# Altium PCB IO板.pcbdoc (part 2 of 2)
Units mil, origin at the board's own origin, x right, y up, seen from the top; angles counter-clockwise.
Board outline 8682.68 x 4967.05 mil, 2 copper layers (Top Layer, Bottom Layer); 114 components, 269 nets, 754 pads, 560 vias.
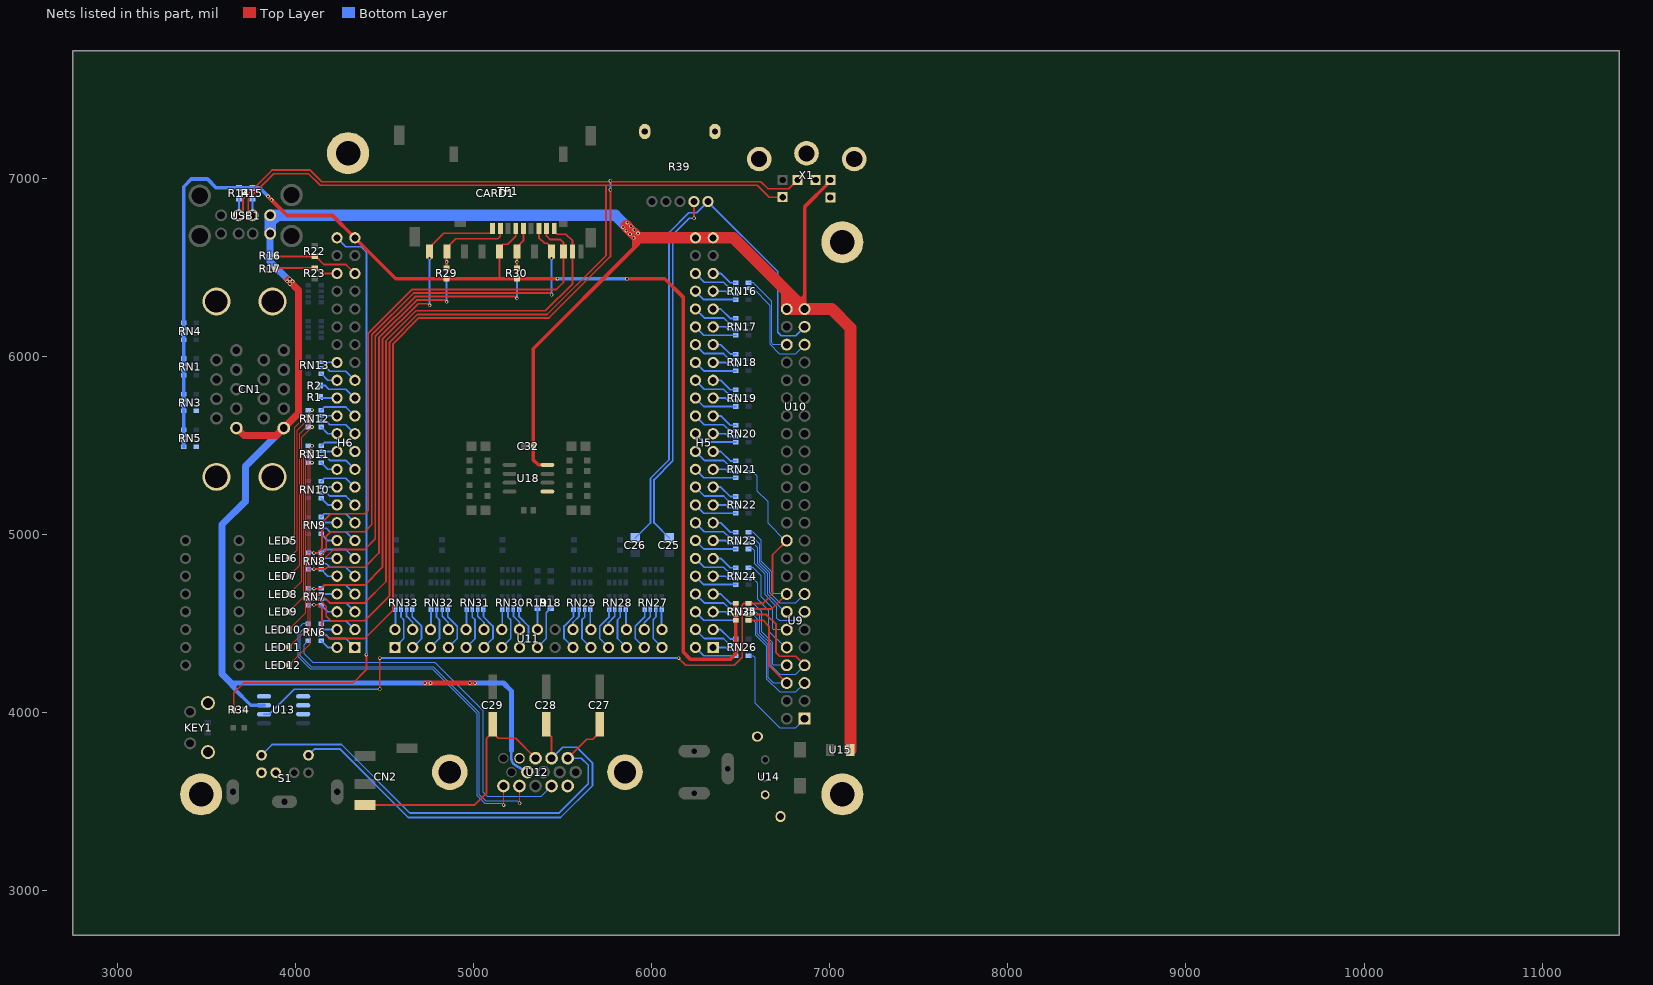
[diagram p2: the nets of this part, all layers, seen from the top]

## Via types
v1: diameter 20, hole 12, Top Layer to Bottom Layer, 560 vias

## Nets (pads, with @x,y where several pads share a name; then routed paths per layer and width w, separated by ;. In a path a pad name is that pad's centre, name@x,y a point inside that pad or via, vN(x,y) a via of type N, cw(c..) or ccw(c..) an arc to the next point about the centre after c; other vN are vias at no path point) (continued)
IO/12: H6.34 RN13.2 | length 89.9
  Bottom Layer w10: RN13.2@4144.1,5967.8 4232.91,5967.8 H6.34@4233.66,5967.05
IO/13: H6.31 RN13.3 | length 218.2
  Bottom Layer w10: RN13.3@4144.1,5936.3 4174.41,5936.3 4193.66,5917.05 4283.66,5917.05 H6.31@4333.66,5867.05
IO/14: H6.32 RN13.4 | length 105.2
  Bottom Layer w10: RN13.4@4144.1,5904.81 4181.86,5867.05 H6.32@4233.66,5867.05
IO/15: H6.29 R2.2 | length 224.3
  Bottom Layer w10: R2.2@4138.32,5837.05 4168.32,5837.05 4188.32,5817.05 4283.66,5817.05 H6.29@4333.66,5767.05
IO/16: H6.30 R1.2 | length 89.9
  Bottom Layer w10: R1.2@4144.1,5767.8 4232.91,5767.8 H6.30@4233.66,5767.05
IO/43: H6.27 RN12.1 | length 217.6
  Bottom Layer w10: RN12.1@4144.1,5699.29 4161.86,5717.05 4283.66,5717.05 H6.27@4333.66,5667.05
IO/44: H6.28 RN12.2 | length 89.9
  Bottom Layer w10: RN12.2@4144.1,5667.8 4232.91,5667.8 H6.28@4233.66,5667.05
IO/45: H6.25 RN12.3 | length 218.2
  Bottom Layer w10: RN12.3@4144.1,5636.3 4174.41,5636.3 4193.66,5617.05 4283.66,5617.05 H6.25@4333.66,5567.05
IO/46: H6.26 RN12.4 | length 105.2
  Bottom Layer w10: RN12.4@4144.1,5604.81 4181.86,5567.05 H6.26@4233.66,5567.05
IO/47: H6.23 RN11.1 | length 217.6
  Bottom Layer w10: RN11.1@4144.1,5499.29 4161.86,5517.05 4283.66,5517.05 H6.23@4333.66,5467.05
IO/48: H6.24 RN11.2 | length 89.9
  Bottom Layer w10: RN11.2@4144.1,5467.8 4232.91,5467.8 H6.24@4233.66,5467.05
IO/49: H6.21 RN11.3 | length 218.2
  Bottom Layer w10: RN11.3@4144.1,5436.3 4174.41,5436.3 4193.66,5417.05 4283.66,5417.05 H6.21@4333.66,5367.05
IO/50: H6.22 RN11.4 | length 105.2
  Bottom Layer w10: RN11.4@4144.1,5404.81 4181.86,5367.05 H6.22@4233.66,5367.05
IO/53: H6.19 RN10.1 | length 217.6
  Bottom Layer w10: RN10.1@4144.1,5299.29 4161.86,5317.05 4283.66,5317.05 H6.19@4333.66,5267.05
IO/54: H6.20 RN10.2 | length 89.9
  Bottom Layer w10: RN10.2@4144.1,5267.8 4232.91,5267.8 H6.20@4233.66,5267.05
IO/55: H6.17 RN10.3 | length 218.2
  Bottom Layer w10: RN10.3@4144.1,5236.3 4174.41,5236.3 4193.66,5217.05 4283.66,5217.05 H6.17@4333.66,5167.05
IO/56: H6.18 RN10.4 | length 105.2
  Bottom Layer w10: RN10.4@4144.1,5204.81 4181.86,5167.05 H6.18@4233.66,5167.05
IO/57: H6.15 RN9.1 | length 217.6
  Bottom Layer w10: RN9.1@4144.1,5099.29 4161.86,5117.05 4283.66,5117.05 H6.15@4333.66,5067.05
IO/58: H6.16 RN9.2 | length 89.9
  Bottom Layer w10: RN9.2@4144.1,5067.8 4232.91,5067.8 H6.16@4233.66,5067.05
IO/59: H6.13 RN9.3 | length 218.2
  Bottom Layer w10: RN9.3@4144.1,5036.3 4174.41,5036.3 4193.66,5017.05 4283.66,5017.05 H6.13@4333.66,4967.05
IO/60: H6.14 RN9.4 | length 105.2
  Bottom Layer w10: RN9.4@4144.1,5004.81 4181.86,4967.05 H6.14@4233.66,4967.05
IO/61: H6.11 RN8.1 | length 217.6
  Bottom Layer w10: RN8.1@4144.1,4899.29 4161.86,4917.05 4283.66,4917.05 H6.11@4333.66,4867.05
IO/62: H6.12 RN8.2 | length 89.9
  Bottom Layer w10: RN8.2@4144.1,4867.8 4232.91,4867.8 H6.12@4233.66,4867.05
IO/63: H6.9 RN8.3 | length 218.2
  Bottom Layer w10: RN8.3@4144.1,4836.3 4174.41,4836.3 4193.66,4817.05 4283.66,4817.05 H6.9@4333.66,4767.05
IO/64: H6.10 RN8.4 | length 105.2
  Bottom Layer w10: RN8.4@4144.1,4804.81 4181.86,4767.05 H6.10@4233.66,4767.05
IO/65: H6.7 RN7.1 | length 217.6
  Bottom Layer w10: RN7.1@4144.1,4699.29 4161.86,4717.05 4283.66,4717.05 H6.7@4333.66,4667.05
IO/66: H6.8 RN7.2 | length 89.9
  Bottom Layer w10: RN7.2@4144.1,4667.8 4232.91,4667.8 H6.8@4233.66,4667.05
IO/67: H6.5 RN7.3 | length 218.2
  Bottom Layer w10: RN7.3@4144.1,4636.3 4174.41,4636.3 4193.66,4617.05 4283.66,4617.05 H6.5@4333.66,4567.05
IO/68: H6.6 RN7.4 | length 105.2
  Bottom Layer w10: RN7.4@4144.1,4604.81 4181.86,4567.05 H6.6@4233.66,4567.05
IO/73: H6.3 RN6.1 | length 217.6
  Bottom Layer w10: RN6.1@4144.1,4499.29 4161.86,4517.05 4283.66,4517.05 H6.3@4333.66,4467.05
IO/74: H6.4 RN6.2 | length 89.9
  Bottom Layer w10: RN6.2@4144.1,4467.8 4232.91,4467.8 H6.4@4233.66,4467.05
IO/75: H6.1 RN6.3 | length 218.2
  Bottom Layer w10: RN6.3@4144.1,4436.3 4174.41,4436.3 4193.66,4417.05 4283.66,4417.05 H6.1@4333.66,4367.05
IO/76: H6.2 RN6.4 | length 105.2
  Bottom Layer w10: RN6.4@4144.1,4404.81 4181.86,4367.05 H6.2@4233.66,4367.05
IO/121: H5.2 RN26.1 | length 247.1
  Bottom Layer w10: H5.2@6245.67,4367.05 6292.91,4319.81 RN26.1@6473.23,4319.81
IO/122: H5.1 RN26.2 | length 134.1
  Bottom Layer w10: H5.1@6345.67,4367.05 6415.67,4367.05 6431.42,4351.3 RN26.2@6473.23,4351.3
IO/123: H5.4 RN26.3 | length 262.5
  Bottom Layer w10: H5.4@6245.67,4467.05 6295.67,4417.05 6403.66,4417.05 6437.91,4382.8 RN26.3@6473.23,4382.8
IO/124: H5.3 RN26.4 | length 149.4
  Bottom Layer w10: H5.3@6345.67,4467.05 6388.66,4467.05 6441.42,4414.29 RN26.4@6473.23,4414.29
IO/125: H5.6 RN25.1 | length 247.1
  Bottom Layer w10: H5.6@6245.67,4567.05 6292.91,4519.81 RN25.1@6473.23,4519.81
IO/126: H5.5 RN25.2 | length 134.1
  Bottom Layer w10: H5.5@6345.67,4567.05 6415.67,4567.05 6431.42,4551.3 RN25.2@6473.23,4551.3
IO/127: H5.8 RN25.3 | length 262.5
  Bottom Layer w10: H5.8@6245.67,4667.05 6295.67,4617.05 6403.66,4617.05 6437.91,4582.8 RN25.3@6473.23,4582.8
IO/128: H5.7 RN25.4 | length 149.4
  Bottom Layer w10: H5.7@6345.67,4667.05 6388.66,4667.05 6441.42,4614.29 RN25.4@6473.23,4614.29
IO/131: H5.10 RN24.1 | length 247.1
  Bottom Layer w10: H5.10@6245.67,4767.05 6292.91,4719.81 RN24.1@6473.23,4719.81
IO/132: H5.9 RN24.2 | length 134.1
  Bottom Layer w10: H5.9@6345.67,4767.05 6415.67,4767.05 6431.42,4751.3 RN24.2@6473.23,4751.3
IO/133: H5.12 RN24.3 | length 262.5
  Bottom Layer w10: H5.12@6245.67,4867.05 6295.67,4817.05 6403.66,4817.05 6437.91,4782.8 RN24.3@6473.23,4782.8
IO/134: H5.11 RN24.4 | length 149.4
  Bottom Layer w10: H5.11@6345.67,4867.05 6388.66,4867.05 6441.42,4814.29 RN24.4@6473.23,4814.29
IO/135: H5.14 RN23.1 | length 247.1
  Bottom Layer w10: H5.14@6245.67,4967.05 6292.91,4919.81 RN23.1@6473.23,4919.81
IO/136: H5.13 RN23.2 | length 134.1
  Bottom Layer w10: H5.13@6345.67,4967.05 6415.67,4967.05 6431.42,4951.3 RN23.2@6473.23,4951.3
IO/137: H5.16 RN23.3 | length 262.5
  Bottom Layer w10: H5.16@6245.67,5067.05 6295.67,5017.05 6403.66,5017.05 6437.91,4982.8 RN23.3@6473.23,4982.8
IO/138: H5.15 RN23.4 | length 149.4
  Bottom Layer w10: H5.15@6345.67,5067.05 6388.66,5067.05 6441.42,5014.29 RN23.4@6473.23,5014.29
IO/139: H5.18 RN22.1 | length 247.1
  Bottom Layer w10: H5.18@6245.67,5167.05 6292.91,5119.81 RN22.1@6473.23,5119.81
IO/140: H5.17 RN22.2 | length 134.1
  Bottom Layer w10: H5.17@6345.67,5167.05 6415.67,5167.05 6431.42,5151.3 RN22.2@6473.23,5151.3
IO/141: H5.20 RN22.3 | length 262.5
  Bottom Layer w10: H5.20@6245.67,5267.05 6295.67,5217.05 6403.66,5217.05 6437.91,5182.8 RN22.3@6473.23,5182.8
IO/143: H5.19 RN22.4 | length 149.4
  Bottom Layer w10: H5.19@6345.67,5267.05 6388.66,5267.05 6441.42,5214.29 RN22.4@6473.23,5214.29
IO/152: H5.22 RN21.1 | length 247.1
  Bottom Layer w10: H5.22@6245.67,5367.05 6292.91,5319.81 RN21.1@6473.23,5319.81
IO/153: H5.21 RN21.2 | length 134.1
  Bottom Layer w10: H5.21@6345.67,5367.05 6415.67,5367.05 6431.42,5351.3 RN21.2@6473.23,5351.3
IO/156: H5.24 RN21.3 | length 262.5
  Bottom Layer w10: H5.24@6245.67,5467.05 6295.67,5417.05 6403.66,5417.05 6437.91,5382.8 RN21.3@6473.23,5382.8
IO/158: H5.23 RN21.4 | length 149.4
  Bottom Layer w10: H5.23@6345.67,5467.05 6388.66,5467.05 6441.42,5414.29 RN21.4@6473.23,5414.29
IO/159: H5.26 RN20.1 | length 247.1
  Bottom Layer w10: H5.26@6245.67,5567.05 6292.91,5519.81 RN20.1@6473.23,5519.81
IO/160: H5.25 RN20.2 | length 134.1
  Bottom Layer w10: H5.25@6345.67,5567.05 6415.67,5567.05 6431.42,5551.3 RN20.2@6473.23,5551.3
IO/161: H5.28 RN20.3 | length 262.5
  Bottom Layer w10: H5.28@6245.67,5667.05 6295.67,5617.05 6403.66,5617.05 6437.91,5582.8 RN20.3@6473.23,5582.8
IO/162: H5.27 RN20.4 | length 149.4
  Bottom Layer w10: H5.27@6345.67,5667.05 6388.66,5667.05 6441.42,5614.29 RN20.4@6473.23,5614.29
IO/163: H5.30 RN19.1 | length 247.1
  Bottom Layer w10: H5.30@6245.67,5767.05 6292.91,5719.81 RN19.1@6473.23,5719.81
IO/164: H5.29 RN19.2 | length 134.1
  Bottom Layer w10: H5.29@6345.67,5767.05 6415.67,5767.05 6431.42,5751.3 RN19.2@6473.23,5751.3
IO/165: H5.32 RN19.3 | length 262.5
  Bottom Layer w10: H5.32@6245.67,5867.05 6295.67,5817.05 6403.66,5817.05 6437.91,5782.8 RN19.3@6473.23,5782.8
IO/166: H5.31 RN19.4 | length 149.4
  Bottom Layer w10: H5.31@6345.67,5867.05 6388.66,5867.05 6441.42,5814.29 RN19.4@6473.23,5814.29
IO/167: H5.34 RN18.1 | length 247.1
  Bottom Layer w10: H5.34@6245.67,5967.05 6292.91,5919.81 RN18.1@6473.23,5919.81
IO/168: H5.33 RN18.2 | length 134.1
  Bottom Layer w10: H5.33@6345.67,5967.05 6415.67,5967.05 6431.42,5951.3 RN18.2@6473.23,5951.3
IO/169: H5.36 RN18.3 | length 262.5
  Bottom Layer w10: H5.36@6245.67,6067.05 6295.67,6017.05 6403.66,6017.05 6437.91,5982.8 RN18.3@6473.23,5982.8
IO/170: H5.35 RN18.4 | length 149.4
  Bottom Layer w10: H5.35@6345.67,6067.05 6388.66,6067.05 6441.42,6014.29 RN18.4@6473.23,6014.29
IO/173: H5.38 RN17.1 | length 247.1
  Bottom Layer w10: H5.38@6245.67,6167.05 6292.91,6119.81 RN17.1@6473.23,6119.81
IO/174: H5.37 RN17.2 | length 134.1
  Bottom Layer w10: H5.37@6345.67,6167.05 6415.67,6167.05 6431.42,6151.3 RN17.2@6473.23,6151.3
IO/175: H5.40 RN17.3 | length 262.5
  Bottom Layer w10: H5.40@6245.67,6267.05 6295.67,6217.05 6403.66,6217.05 6437.91,6182.8 RN17.3@6473.23,6182.8
IO/176: H5.39 RN17.4 | length 149.4
  Bottom Layer w10: H5.39@6345.67,6267.05 6388.66,6267.05 6441.42,6214.29 RN17.4@6473.23,6214.29
IO/177: H5.42 RN16.1 | length 247.1
  Bottom Layer w10: H5.42@6245.67,6367.05 6292.91,6319.81 RN16.1@6473.23,6319.81
IO/178: H5.41 RN16.2 | length 134.1
  Bottom Layer w10: H5.41@6345.67,6367.05 6415.67,6367.05 6431.42,6351.3 RN16.2@6473.23,6351.3
IO/179: H5.44 RN16.3 | length 262.5
  Bottom Layer w10: H5.44@6245.67,6467.05 6295.67,6417.05 6403.66,6417.05 6437.91,6382.8 RN16.3@6473.23,6382.8
IO/180: H5.43 RN16.4 | length 149.4
  Bottom Layer w10: H5.43@6345.67,6467.05 6388.66,6467.05 6441.42,6414.29 RN16.4@6473.23,6414.29
IORQ: RN24.5 U9.12 | length 494.9
  Bottom Layer w6: RN24.5@6544.1,4814.29 6571.42,4814.29 6615.69,4770.02 6615.69,4650.93 6679.66,4586.96 6679.66,4473.05 6685.66,4467.05 U9.12@6758.66,4467.05
KCLK: R14.1 RN7.5 USB1.7 X1.1 | length 7481.1
  Top Layer w10: USB1.7@3681.27,6793.1 3706.27,6818.1 3706.27,6884.66 3868.66,7047.05 4083.66,7047.05 4148.66,6982.05 6613.65,6982.05 6653.65,6942.05 6769.67,6942.05 X1.1@6818.67,6991.05 ; v1(4103.66,4607.05) 4128.66,4607.05 4148.66,4587.05 4148.66,4457.05 4188.66,4417.05 4388.66,4417.05 4548.66,4577.05 4548.66,6072.05 4693.66,6217.05 5423.66,6217.05 5768.66,6562.05 v1(5768.66,6937.05)
  Bottom Layer w10: USB1.7@3681.27,6793.1 3683.66,6795.49 R14.1@3683.66,6887.39 ; RN7.5@4073.23,4604.81 4075.47,4607.05 v1(4103.66,4607.05) ; v1(5768.66,6937.05) v1(5768.66,6987.05)
KDAT: R15.1 RN7.6 USB1.6 X1.6 | length 7140.9
  Top Layer w10: USB1.6@3760.07,6793.1 3735.07,6818.1 3735.07,6883.46 3878.66,7027.05 4073.66,7027.05 4138.66,6962.05 5743.66,6962.05 ; v1(4103.66,4637.05) 4133.66,4637.05 4173.66,4597.05 4173.66,4542.05 4198.66,4517.05 4388.66,4517.05 4528.66,4657.05 4528.66,6080.33 4684.52,6236.19 5412.8,6236.19 5743.66,6567.05 5743.66,6962.05 ; X1.6@6735.67,6895.05 6660.66,6895.05 6593.66,6962.05 5743.66,6962.05
  Bottom Layer w10: R15.1@3758.66,6887.39 3758.66,6794.51 USB1.6@3760.07,6793.1 ; RN7.6@4073.23,4636.3 4073.98,4637.05 v1(4103.66,4637.05)
LED1: LED5.2 RN12.8 | length 786.3
  Top Layer w6: LED5.2@3963.16,4966.85 3996.66,5000.35 3996.66,5602.72 v1(4093.23,5699.29)
LED2: LED6.2 RN12.7 | length 854.8
  Top Layer w6: LED6.2@3963.16,4866.85 4008.66,4912.35 4008.66,5583.23 v1(4093.23,5667.8)
LED3: LED7.2 RN12.6 | length 923.3
  Top Layer w6: LED7.2@3963.16,4766.85 4020.66,4824.35 4020.66,5563.73 v1(4093.23,5636.3)
LED4: LED8.2 RN12.5 | length 991.8
  Top Layer w6: LED8.2@3963.16,4666.85 4032.66,4736.35 4032.66,5544.24 v1(4093.23,5604.81)
LED5: LED9.2 RN11.8 | length 986.3
  Top Layer w6: LED9.2@3963.16,4566.85 4044.66,4648.35 4044.66,5450.72 v1(4093.23,5499.29)
LED6: LED10.2 RN11.7 | length 1054.8
  Top Layer w6: LED10.2@3963.16,4466.85 4056.66,4560.35 4056.66,5431.23 v1(4093.23,5467.8)
LED7: LED11.2 RN11.6 | length 1123.3
  Top Layer w6: LED11.2@3963.16,4366.85 4068.66,4472.35 4068.66,5411.73 v1(4093.23,5436.3)
LED8: LED12.2 RN11.5 | length 1191.8
  Top Layer w6: LED12.2@3963.16,4266.85 4080.66,4384.35 4080.66,5392.24 v1(4093.23,5404.81)
M1: RN24.7 U9.10 | length 493.6
  Bottom Layer w6: RN24.7@6544.1,4751.3 6570.62,4751.3 6591.69,4730.22 6591.69,4640.99 6655.66,4577.02 6655.66,4461.56 6750.18,4367.05 U9.10@6758.66,4367.05
MERQ: RN23.8 U9.13 | length 650.2
  Bottom Layer w6: RN23.8@6544.1,4919.81 6568.69,4919.81 6579.69,4908.81 6579.69,4836.02 6637.68,4778.03 6637.68,4662.58 6703.69,4596.56 6703.69,4532.02 6718.66,4517.05 6808.66,4517.05 U9.13@6858.66,4567.05
PWRLED: H6.48 R34.1 | length 3437.1
  Top Layer w10: R34.1@3654,4017.05 3653.66,4017.39 3653.66,4112.05 3708.66,4167.05 4323.66,4167.05 4398.66,4242.05 v1(4398.66,4327.05)
  Bottom Layer w10: H6.48@4233.66,6667.05 4283.66,6617.05 4368.66,6617.05 4398.66,6587.05 v1(4398.66,4327.05)
RD: RN23.6 U9.15 | length 612.6
  Bottom Layer w6: RN23.6@6544.1,4982.8 6569.57,4982.8 6603.69,4948.68 6603.69,4845.96 6661.68,4787.97 6661.68,4675.86 6720.48,4617.05 6808.66,4617.05 U9.15@6858.66,4667.05
RESET: RN21.7 RN34.4 U9.22 U13.6 | length 4269.3
  Top Layer w10: v1(4473.66,4132.05) v1(4473.66,4307.05) ; v1(6151.16,4307.05) 6191.16,4267.05 6463.66,4267.05 6508.66,4312.05 6508.66,4607.05 6515.9,4614.29 RN34.4@6544.1,4614.29 6625.9,4614.29 6678.66,4667.05 6678.66,4887.05 U9.22@6758.66,4967.05
  Bottom Layer w6: RN21.7@6544.1,5351.3 6569.66,5351.3 6590.66,5330.3 6590.66,5247.02 6650.66,5187.02 6650.66,5066.56 6750.18,4967.05 U9.22@6758.66,4967.05
  Bottom Layer w10: U13.6@3823.58,3992.05 3853.66,3992.05 3993.66,4132.05 v1(4473.66,4132.05) ; v1(4473.66,4307.05) v1(6151.16,4307.05)
RFSH: RN25.6 RN34.2 U9.7 | length 1140.5
  Top Layer w10: RN34.2@6544.1,4551.3 6644.41,4551.3 6698.66,4497.05 6698.66,4337.05 6718.66,4317.05 6808.66,4317.05 U9.7@6858.66,4267.05
  Bottom Layer w6: RN25.6@6544.1,4582.8 6570.94,4582.8 6605.66,4548.08 6605.66,4448.99 6667.66,4386.99 6667.66,4268.05 6718.66,4217.05 6808.66,4217.05 U9.7@6858.66,4267.05
RSV5: RN25.7 RN34.1 U9.6 | length 1020.3
  Top Layer w10: RN34.1@6544.1,4519.81 6625.9,4519.81 6658.66,4487.05 6658.66,4267.05 U9.6@6758.66,4167.05
  Bottom Layer w6: RN25.7@6544.1,4551.3 6569.41,4551.3 6593.66,4527.05 6593.66,4444.02 6655.66,4382.02 6655.66,4197.02 6685.63,4167.05 U9.6@6758.66,4167.05
RSV16: RN23.5 RN34.3 U9.16 | length 743.3
  Top Layer w10: RN34.3@6544.1,4582.8 6674.41,4582.8 U9.16@6758.66,4667.05
  Bottom Layer w6: RN23.5@6544.1,5014.29 6571.42,5014.29 6615.69,4970.02 6615.69,4850.93 6673.68,4792.94 6673.68,4680.83 6687.45,4667.05 U9.16@6758.66,4667.05
SCLK: RN6.5 U12.12 | length 2097.6
  Bottom Layer w6: RN6.5@4073.23,4404.81 4049.66,4381.24 4049.66,4331.96 4099.57,4282.05 4784.57,4282.05 5054.66,4011.96 5054.66,3553.02 5078.63,3529.05 5378.34,3529.05 U12.12@5438.4,3589.1
SD_CK: CARD1.5 R30.1 RN8.6 TF1.5 | length 2903.8
  Top Layer w10: v1(4103.66,4837.05) 4133.66,4837.05 4213.66,4917.05 4388.66,4917.05 4448.66,4977.05 4448.66,6113.47 4672.24,6337.05 5233.66,6337.05 v1(5243.66,6327.05) ; R30.1@5243.66,6496.71 v1(5243.66,6532.05) 5243.66,6613.23 5280.32,6649.89 TF1.5@5280.32,6718.39
  Bottom Layer w10: RN8.6@4073.23,4836.3 4073.98,4837.05 v1(4103.66,4837.05) ; v1(5243.66,6327.05) v1(5243.66,6532.05)
SD_CM: CARD1.1 R29.1 RN8.5 TF1.2 | length 2823.9
  Top Layer w10: v1(4103.66,4807.05) 4168.66,4807.05 4178.66,4817.05 4388.66,4817.05 4468.66,4897.05 4468.66,6105.19 4680.52,6317.05 4838.66,6317.05 v1(4848.66,6307.05) ; R29.1@4848.66,6496.71 v1(4848.66,6532.05) 4848.66,6589.73 CARD1.1@4850.19,6591.26 4850.19,6611.26 4900.98,6662.05 5137.56,6662.05 5150.4,6674.89 TF1.2@5150.4,6718.39
  Bottom Layer w10: RN8.5@4073.23,4804.81 4075.47,4807.05 v1(4103.66,4807.05) ; v1(4848.66,6307.05) v1(4848.66,6532.05)
SD_D0: CARD1.7 RN8.7 TF1.7 | length 3027.5
  Top Layer w10: v1(4103.66,4867.05) 4128.66,4867.05 4173.66,4912.05 4173.66,4992.05 4198.66,5017.05 4388.66,5017.05 4428.66,5057.05 4428.66,6121.75 4663.96,6357.05 5428.66,6357.05 v1(5438.66,6347.05) ; TF1.7@5366.93,6718.39 5366.93,6668.18 5398.85,6636.26 5412.99,6636.26 5437.99,6611.26 CARD1.7@5437.99,6591.26
  Bottom Layer w10: RN8.7@4073.23,4867.8 4102.91,4867.8 v1(4103.66,4867.05) ; v1(5438.66,6347.05) v1(5438.66,6552.05)
SD_D1: CARD1.8 RN8.8 TF1.8 | length 3104.3
  Top Layer w10: v1(4103.66,4897.05) 4123.66,4897.05 4148.66,4922.05 4148.66,5067.05 4198.66,5117.05 4388.66,5117.05 4408.66,5137.05 4408.66,6130.04 4655.67,6377.05 5466.16,6377.05 5504.91,6415.8 CARD1.8@5504.91,6591.26 5504.91,6640.8 5488.66,6657.05 5430.24,6657.05 5410.24,6677.05 TF1.8@5410.24,6718.39
  Bottom Layer w10: RN8.8@4073.23,4899.29 4101.42,4899.29 v1(4103.66,4897.05)
SD_D2: CARD1.10 RN7.7 TF1.CD | length 3418.7
  Top Layer w10: v1(4103.66,4667.05) 4143.66,4667.05 4193.66,4617.05 4388.66,4617.05 4508.66,4737.05 4508.66,6088.62 4677.09,6257.05 5403.66,6257.05 5556.09,6409.48 CARD1.10@5556.09,6591.26 5556.09,6649.62 5518.66,6687.05 5468.66,6687.05 5453.55,6702.16 TF1.CD@5453.55,6718.39
  Bottom Layer w10: RN7.7@4073.23,4667.8 4102.91,4667.8 v1(4103.66,4667.05)
SD_D3: CARD1.9 RN7.8 TF1.1 | length 2791.5
  Top Layer w10: v1(4103.66,4697.05) 4143.66,4697.05 4163.66,4717.05 4388.66,4717.05 4488.66,4817.05 4488.66,6096.9 4688.81,6297.05 4743.66,6297.05 v1(4753.66,6287.05) ; CARD1.9@4751.76,6591.26 4751.76,6611.26 4832.55,6692.05 5095.75,6692.05 5107.09,6703.39 TF1.1@5107.09,6718.39
  Bottom Layer w10: RN7.8@4073.23,4699.29 4075.47,4697.05 v1(4103.66,4697.05) ; v1(4753.66,6287.05) v1(4753.66,6552.05)
SDAT: RN6.8 U12.15 | length 2102.9
  Top Layer w6: U12.15@5167.91,3589.1 5168.66,3588.35 v1(5168.66,3482.05)
  Bottom Layer w6: RN6.8@4073.23,4499.29 4040.9,4499.29 4013.66,4472.05 4013.66,4317.05 4084.66,4246.05 4769.66,4246.05 5018.66,3997.05 5018.66,3538.11 5063.72,3493.05 5157.66,3493.05 v1(5168.66,3482.05)
SL0: RN29.4 U11.21 | length 257.1
  Bottom Layer w10: U11.21@5558.66,4367.05 5508.66,4417.05 5508.66,4487.05 5561.42,4539.81 RN29.4@5561.42,4581.61
SL1: RN29.3 U11.22 | length 128.8
  Bottom Layer w10: U11.22@5558.66,4467.05 5558.66,4507.05 5592.91,4541.3 RN29.3@5592.91,4581.61
SL2: RN29.2 U11.23 | length 241.8
  Bottom Layer w10: RN29.2@5624.41,4581.61 5624.41,4537.8 5608.66,4522.05 5608.66,4417.05 U11.23@5658.66,4367.05
SL3: RN29.1 U11.24 | length 115.7
  Bottom Layer w10: RN29.1@5655.9,4581.61 5655.9,4469.81 U11.24@5658.66,4467.05
SL4: RN28.4 U11.25 | length 257.1
  Bottom Layer w10: U11.25@5758.66,4367.05 5708.66,4417.05 5708.66,4487.05 5761.42,4539.81 RN28.4@5761.42,4581.61
SL5: RN28.3 U11.26 | length 128.8
  Bottom Layer w10: U11.26@5758.66,4467.05 5758.66,4507.05 5792.91,4541.3 RN28.3@5792.91,4581.61
SLTSL1: RN25.8 U9.5 | length 651.3
  Bottom Layer w6: RN25.8@6544.1,4519.81 6570.66,4519.81 6581.66,4508.81 6581.66,4439.05 6643.66,4377.05 6643.66,4192.05 6718.66,4117.05 6808.66,4117.05 U9.5@6858.66,4167.05
SLTSL2: RN26.8 U9.1 | length 651.5
  Bottom Layer w6: RN26.8@6544.1,4319.81 6570.9,4319.81 6578.66,4312.05 6578.66,4057.05 6718.66,3917.05 6808.66,3917.05 U9.1@6858.66,3967.05
SOUND_L: C26.1 R39.5 U10.21 | length 3158.3
  Bottom Layer w10: C26.1@5908.66,4981.42 5993.66,5066.42 5993.66,5317.05 6097.66,5421.05 6097.66,6696.05 6209.14,6807.53 6253.47,6807.53 R39.5@6316.14,6870.19 6708.66,6477.68 6708.66,6137.05 6728.66,6117.05 6808.66,6117.05 U10.21@6858.66,6167.05
SOUND_R: C25.1 R39.3 | length 2034.1
  Top Layer w10: R39.3@6237.4,6870.19 6238.66,6868.94 v1(6238.66,6777.05)
  Bottom Layer w10: C25.1@6098.66,4981.42 6013.66,5066.42 6013.66,5309.42 6118.66,5414.42 6118.66,6685.09 6210.62,6777.05 v1(6238.66,6777.05)
SR0: RN28.2 U11.27 | length 241.8
  Bottom Layer w10: RN28.2@5824.41,4581.61 5824.41,4537.8 5808.66,4522.05 5808.66,4417.05 U11.27@5858.66,4367.05
SR1: RN28.1 U11.28 | length 115.7
  Bottom Layer w10: RN28.1@5855.9,4581.61 5855.9,4469.81 U11.28@5858.66,4467.05
SR2: RN27.4 U11.29 | length 257.1
  Bottom Layer w10: U11.29@5958.66,4367.05 5908.66,4417.05 5908.66,4487.05 5961.42,4539.81 RN27.4@5961.42,4581.61
SR3: RN27.3 U11.30 | length 128.8
  Bottom Layer w10: U11.30@5958.66,4467.05 5958.66,4505.24 5992.91,4539.49 RN27.3@5992.91,4581.61
SR4: RN27.2 U11.31 | length 241.8
  Bottom Layer w10: RN27.2@6024.41,4581.61 6024.41,4539.06 6008.66,4523.31 6008.66,4417.05 U11.31@6058.66,4367.05
SR5: RN27.1 U11.32 | length 115.7
  Bottom Layer w10: RN27.1@6055.9,4581.61 6055.9,4469.81 U11.32@6058.66,4467.05
SW1: RN16.6 U10.19 | length 614.5
  Bottom Layer w6: RN16.6@6544.1,6382.8 6569.36,6382.8 6662.66,6289.5 6662.66,6071.53 6717.15,6017.05 6808.66,6017.05 U10.19@6858.66,6067.05
SW2: RN16.5 U10.20 | length 494.9
  Bottom Layer w6: RN16.5@6544.1,6414.29 6569.84,6414.29 6674.66,6309.47 6674.66,6076.5 6684.12,6067.05 U10.20@6758.66,6067.05
USBN1: H6.43 R16.1 R22.2 | length 486.8
  Top Layer w10: R16.1@3888.32,6567.05 3892.98,6562.39 R22.2@4108.66,6562.39 4113.66,6562.39 4159,6517.05 4283.66,6517.05 H6.43@4333.66,6467.05
USBP1: H6.44 R17.1 R23.2 | length 359.6
  Top Layer w10: R17.1@3888.32,6492.05 3892.98,6496.71 R23.2@4108.66,6496.71 4114,6496.71 4143.66,6467.05 H6.44@4233.66,6467.05
VB0: RN33.4 U11.2 | length 115.7
  Bottom Layer w10: U11.2@4558.66,4467.05 4561.42,4469.81 RN33.4@4561.42,4581.61
VB1: RN33.3 U11.1 | length 241.8
  Bottom Layer w10: U11.1@4558.66,4367.05 4608.66,4417.05 4608.66,4522.05 4592.91,4537.8 RN33.3@4592.91,4581.61
VB2: RN33.2 U11.4 | length 128.8
  Bottom Layer w10: RN33.2@4624.41,4581.61 4624.41,4541.3 4658.66,4507.05 U11.4@4658.66,4467.05
VB3: RN33.1 U11.3 | length 257.1
  Bottom Layer w10: RN33.1@4655.9,4581.61 4655.9,4539.81 4708.66,4487.05 4708.66,4417.05 U11.3@4658.66,4367.05
VB4: RN32.4 U11.6 | length 115.7
  Bottom Layer w10: U11.6@4758.66,4467.05 4761.42,4469.81 RN32.4@4761.42,4581.61
VB5: RN32.3 U11.5 | length 241.8
  Bottom Layer w10: U11.5@4758.66,4367.05 4808.66,4417.05 4808.66,4522.05 4792.91,4537.8 RN32.3@4792.91,4581.61
VB_CV: C29.2 CN2.2 U12.3 | length 1467.2
  Top Layer w10: CN2.2@4390.55,3482.6 4391.1,3482.05 5003.66,3482.05 5073.66,3552.05 5073.66,3857.05 C29.2@5108.66,3892.04 ; U12.3@5348.23,3745 5236.18,3857.05 5138.66,3857.05 5108.66,3887.05 C29.2@5108.66,3892.04 ; C29.2@5108.66,3892.04 C29.2@5108.66,3936.93 5113.76,3936.93 5113.76,3897.15 C29.2@5108.66,3892.04
VCC5: C32.2 CN1.5 CN1.14 H5.47 H5.48 U10.23 U10.24 U12.9 U13.7 U15.2 U18.8 USB1.1 USB1.5 X1.5 | length 14449.7
  Top Layer w20: U18.8@5415.05,5391.94 5363.77,5391.94 5336.11,5419.59 5336.11,5496.94 C32.2@5336.22,5497.05 5336.22,6044.61 5898.66,6607.05 ; v1(5898.66,6667.05) 5898.66,6631.89 ; 5923.66,6667.05 5923.66,6656.89 5898.66,6631.89 ; 5958.66,6667.05 5898.66,6607.05 ; 6797.31,6328.4 6846.09,6328.4 6858.66,6340.97 ; U10.23@6858.66,6267.05 6858.66,6340.97 ; X1.5@7003.67,6991.05 7003.67,6984.56 6858.66,6839.55 6858.66,6340.97 ; 5898.66,6607.05 5898.66,6631.89
  Top Layer w27.56: v1(4728.66,4167.05) v1(4758.66,4167.05) v1(4978.66,4167.05) v1(5008.66,4167.05)
  Top Layer w39.37: CN1.5@3668.5,5598.94 3710.39,5557.05 3892.75,5557.05 CN1.14@3934.64,5598.94 4018.66,5682.96 4018.66,6372.05 3958.66,6432.05
  Top Layer w66.93: 5858.66,6732.05 5923.66,6667.05 5958.66,6667.05 H5.48@6245.67,6667.05 H5.47@6345.67,6667.05 6458.66,6667.05 6758.66,6367.05 ; U15.2@7115.55,3792.05 7115.55,6162.05 7010.55,6267.05 U10.23@6858.66,6267.05 ; 6758.66,6367.05 U10.24@6758.66,6267.05 U10.23@6858.66,6267.05 ; 6758.66,6367.05 6797.31,6328.4 U10.23@6858.66,6267.05
  Bottom Layer w15: 5212.61,3745 ccw(c5258.07,3745) 5235.34,3705.63 ; 5212.66,3745.05 5212.66,3787.05 ; 5234.66,3706.05 U12.9@5303.15,3667.05
  Bottom Layer w20: 3614.62,4177.05 3658.15,4133.52 ; 3672.53,4167.05 3658.15,4152.67 3658.15,4133.52 ; U13.7@3823.58,4042.05 3749.62,4042.05 3658.15,4133.52
  Bottom Layer w27.56: 3638.66,4167.05 3672.53,4167.05 v1(4728.66,4167.05) v1(4758.66,4167.05) ; v1(4978.66,4167.05) v1(5008.66,4167.05) 5168.66,4167.05 5212.66,4123.05 5212.66,3787.05
  Bottom Layer w39.37: 3638.66,4167.05 3588.66,4217.05 3588.66,5057.05 3718.66,5187.05 3718.66,5382.96 CN1.14@3934.64,5598.94 ; USB1.1@3858.47,6690.7 3858.47,6532.24 3978.66,6412.05
  Bottom Layer w62.99: USB1.1@3858.47,6690.7 3858.47,6752.55 ; 5908.66,6682.05 5797.61,6793.1 3899.02,6793.1 ; 3858.47,6752.55 3899.02,6793.1 ; 3858.47,6752.55 USB1.5@3858.47,6793.1 3899.02,6793.1
  other v1: 3968.66,6407.05 3953.66,6422.05 3983.66,6422.05 3968.66,6437.05 5878.66,6687.05 5923.66,6692.05 5858.66,6707.05 5903.66,6712.05 5838.66,6727.05 5883.66,6732.05 5863.66,6752.05
VCC33: CARD1.4 H6.47 R14.2 R15.2 R29.2 R30.2 RN1.1 RN1.2 RN1.3 RN1.4 RN3.1 RN3.2 RN3.3 RN3.4 RN4.5 RN4.6 RN4.7 RN4.8 RN5.5 RN5.6 RN5.7 RN5.8 RN34.5 RN34.6 RN34.7 RN34.8 TF1.4 | length 7520.9
  Top Layer w10: 5145.79,6437.39 5145.47,6437.71 CARD1.4@5145.47,6591.26 5145.47,6611.26 5165.47,6631.26 5192.87,6631.26 5237.01,6675.4 TF1.4@5237.01,6718.39
  Top Layer w20: v1(3846.16,6899.55) v1(3866.16,6879.55) 3953.66,6792.05 4208.66,6792.05 H6.47@4333.66,6667.05 4563.32,6437.39 R29.2@4848.66,6437.39 5145.79,6437.39 R30.2@5243.66,6437.39 v1(5471.16,6437.39) ; v1(5861.16,6437.05) 6073.66,6437.05 6178.66,6332.05 6178.66,4339.55 6218.66,4299.55 6441.16,4299.55 6473.23,4331.61 RN34.8@6473.23,4519.81 RN34.7@6473.23,4551.3 RN34.6@6473.23,4582.8 RN34.5@6473.23,4614.29
  Bottom Layer w20: RN5.5@3373.23,5494.81 RN5.6@3373.23,5526.3 RN5.7@3373.23,5557.8 RN5.8@3373.23,5589.29 RN3.1@3373.23,5694.81 RN3.2@3373.23,5726.3 RN3.3@3373.23,5757.8 RN3.4@3373.23,5789.29 RN1.1@3373.23,5894.81 RN1.2@3373.23,5926.3 RN1.3@3373.23,5957.8 RN1.4@3373.23,5989.29 RN4.5@3373.23,6094.81 RN4.6@3373.23,6126.3 RN4.7@3373.23,6157.8 RN4.8@3373.23,6189.29 3373.23,6954.11 3416.16,6997.05 3506.16,6997.05 3556.5,6946.71 R14.2@3683.66,6946.71 R15.2@3758.66,6946.71 3799,6946.71 v1(3846.16,6899.55) v1(3866.16,6879.55) ; v1(5471.16,6437.39) 5860.82,6437.39 v1(5861.16,6437.05)
VG0: RN32.2 U11.8 | length 128.8
  Bottom Layer w10: RN32.2@4824.41,4581.61 4824.41,4541.3 4858.66,4507.05 U11.8@4858.66,4467.05
VG1: RN32.1 U11.7 | length 257.1
  Bottom Layer w10: RN32.1@4855.9,4581.61 4855.9,4539.81 4908.66,4487.05 4908.66,4417.05 U11.7@4858.66,4367.05
VG2: RN31.4 U11.10 | length 115.7
  Bottom Layer w10: U11.10@4958.66,4467.05 4961.42,4469.81 RN31.4@4961.42,4581.61
VG3: RN31.3 U11.9 | length 241.8
  Bottom Layer w10: U11.9@4958.66,4367.05 5008.66,4417.05 5008.66,4522.05 4992.91,4537.8 RN31.3@4992.91,4581.61
VG4: RN31.2 U11.12 | length 128.8
  Bottom Layer w10: RN31.2@5024.41,4581.61 5024.41,4541.3 5058.66,4507.05 U11.12@5058.66,4467.05
VG5: RN31.1 U11.11 | length 257.1
  Bottom Layer w10: RN31.1@5055.9,4581.61 5055.9,4539.81 5108.66,4487.05 5108.66,4417.05 U11.11@5058.66,4367.05
VG_SY: C28.2 S1.6 U12.2 | length 2466.5
  Top Layer w10: C28.2@5408.66,3936.93 5408.66,3891.93 5438.39,3862.2 U12.2@5438.4,3745
  Bottom Layer w10: S1.6@4073.37,3762.35 4108.37,3797.36 4248.35,3797.36 4633.66,3412.05 5488.66,3412.05 5668.66,3592.05 5668.66,3717.05 5578.66,3807.05 5500.44,3807.05 U12.2@5438.4,3745
VR0: RN30.4 U11.14 | length 115.7
  Bottom Layer w10: U11.14@5158.66,4467.05 5161.42,4469.81 RN30.4@5161.42,4581.61
VR1: RN30.3 U11.13 | length 241.8
  Bottom Layer w10: U11.13@5158.66,4367.05 5208.66,4417.05 5208.66,4522.05 5192.91,4537.8 RN30.3@5192.91,4581.61
VR2: RN30.2 U11.16 | length 128.8
  Bottom Layer w10: RN30.2@5224.41,4581.61 5224.41,4541.3 5258.66,4507.05 U11.16@5258.66,4467.05
VR3: RN30.1 U11.15 | length 257.1
  Bottom Layer w10: RN30.1@5255.9,4581.61 5255.9,4539.81 5308.66,4487.05 5308.66,4417.05 U11.15@5258.66,4367.05
VR4: R19.1 U11.18 | length 120.3
  Bottom Layer w10: U11.18@5358.66,4467.05 R19.1@5358.66,4587.39
VR5: R18.1 U11.17 | length 251.4
  Bottom Layer w10: U11.17@5358.66,4367.05 5408.66,4417.05 5408.66,4562.39 R18.1@5433.66,4587.39
VR_SC: C27.2 S1.5 U12.1 | length 2608.4
  Top Layer w10: U12.1@5528.54,3745 5635.59,3852.05 5668.66,3852.05 5708.66,3892.04 C27.2@5708.66,3936.93
  Bottom Layer w10: S1.5@3809.59,3762.35 3869.28,3822.05 4258.66,3822.05 4643.66,3437.05 5478.66,3437.05 5643.66,3602.05 5643.66,3707.05 5605.71,3745 U12.1@5528.54,3745
VSYNC: RN6.7 U12.14 | length 2145.3
  Top Layer w6: U12.14@5258.07,3609.1 5258.07,3492.64 v1(5258.66,3492.05)
  Bottom Layer w6: RN6.7@4073.23,4467.8 4044.41,4467.8 4025.66,4449.05 4025.66,4322.02 4089.63,4258.05 4774.63,4258.05 5030.66,4002.02 5030.66,3543.08 5068.69,3505.05 5245.66,3505.05 v1(5258.66,3492.05)
WAIT: RN25.5 U9.8 | length 494.9
  Bottom Layer w6: RN25.5@6544.1,4614.29 6571.42,4614.29 6617.66,4568.05 6617.66,4453.96 6679.66,4391.96 6679.66,4273.02 6685.63,4267.05 U9.8@6758.66,4267.05
WR: RN23.7 U9.14 | length 496.4
  Bottom Layer w6: RN23.7@6544.1,4951.3 6569.41,4951.3 6591.69,4929.02 6591.69,4840.99 6649.68,4783 6649.68,4667.55 6754.42,4562.81 U9.14@6758.66,4567.05
"": CN1.19 CN1.20 CN1.21 CN1.22 KEY1.0 pad.1 R39.6 R39.7 RN3.8 RN5.4 S1.1 S1.3 U12.0 U12.4 U12.11 U13.1 U13.2 U13.3 U13.8 U14.3 U14.4 U18.5 X1.2 X1.8 X1.SH1 X1.SH2 X1.SH3

## Polygon pours and split planes (outlines as drawn)
GND on Top Layer (solid, remove dead copper, pour order 0): 3203.66,3282.5 7356.84,3282.5 7356.84,7387 3203.66,7387
GND on Bottom Layer (solid, remove dead copper, pour order 1): 3248.66,3212.05 7308.66,3212.05 7308.66,7467.05 3248.66,7467.05

## Keep-outs
Board Outline Layer:
  lines w10 net "": 3308.66,3430.04 ccw(c3358.66,3430.04) 3358.66,3380.04 7195.67,3380.04 ccw(c7195.67,3430.04) 7245.67,3430.04 7245.67,7267.05 ccw(c7195.67,7267.05) 7195.67,7317.05 3358.66,7317.05 ccw(c3358.66,7267.05) 3308.66,7267.05 3308.66,3430.04

## Other copper
Top Layer:
  region net KCLK: 6780.06,6959.51 6787.13,6952.44 6815.42,6963.05 6790.67,6987.8
  region net VCC5: 6975.09,6941.83 7031.67,6963.05 6975.67,7006.05 6954.46,6949.48
  region net KDAT: 6692.67,6900.05 6692.67,6890.05 6707.67,6877.55 6707.67,6912.55
  region net SOUND_R: 6214.63,6848.44 6233.66,6816.46 6243.66,6816.86 6261.84,6850.33
  region net $4N8314: 3656.17,6668.56 3676.27,6633.81 3686.27,6633.81 3706.37,6668.56
  region net $4N8313: 3734.97,6668.56 3755.07,6633.81 3765.07,6633.81 3785.17,6668.56
  region net KCLK: 3714.67,6791 3709.8,6814.56 3702.73,6821.63 3679.17,6826.5
  region net KDAT: 3762.16,6826.5 3738.6,6821.63 3731.53,6814.56 3726.67,6791
  region net $4N317: 3708.16,3985.04 3718.16,3985.04 3729.2,4000.04 3697.45,4000.04
  region net PWRLED: 3658.66,4049.06 3648.66,4049.06 3638.13,4034.06 3669.88,4034.06
  region net LED2: 3985.28,4884.72 3981.03,4888.96 3964.06,4882.6 3978.91,4867.75
  region net USBP1: 4076.65,6491.71 4091.65,6480.83 4091.65,6512.58 4076.65,6501.71
  region net USBP1: 4133.41,6470.23 4136.28,6481.5 4125.67,6512.58 4105.13,6480.83
  region net LED5: 3985.28,4584.72 3981.03,4588.96 3964.06,4582.6 3978.91,4567.75
  region net $4N8663: 6967.52,3758.58 6967.52,3825.51 6867.13,3836.36 6867.13,3749.74
  region net $4N8660: 6762.94,3614.45 6800.2,3547.74 6800.2,3634.36 6810.26,3661.77
  region net LED7: 3985.28,4384.72 3981.03,4388.96 3964.06,4382.6 3978.91,4367.75
  region net LED3: 3985.28,4784.72 3981.03,4788.96 3964.06,4782.6 3978.91,4767.75
  region net LED4: 3985.28,4684.72 3981.03,4688.96 3964.06,4682.6 3978.91,4667.75
  region net USBN1: 4335.63,6498.48 4299.34,6508.44 4292.26,6501.37 4302.23,6465.08
  region net USBP1: 4212.83,6490.67 4180.12,6472.05 4180.12,6462.05 4212.83,6443.43
  region net VCC33: 4335.63,6698.48 4302.87,6711.98 4288.73,6697.84 4302.23,6665.08
  region net VCC33: 4331.69,6635.61 4364.45,6622.12 4378.59,6636.26 4365.1,6669.02
  region net $4N10778: 5633.66,5455.47 5643.66,5455.47 5655.79,5470.47 5621.16,5470.47
  region net $4N10781: 5533.66,5455.47 5543.66,5455.47 5556.16,5470.47 5521.54,5470.47
  region net $4N10787: 5543.66,5178.62 5533.66,5178.62 5521.54,5163.62 5556.16,5163.62
  region net SD_D1: 5415.24,6677.05 5424.02,6686.89 5396.46,6686.89 5405.24,6677.05
  region net SD_D0: 5361.93,6671.89 5371.93,6671.89 5380.71,6686.89 5353.15,6686.89
  region net SD_CK: 5275.32,6671.89 5285.32,6671.89 5294.1,6686.89 5266.54,6686.89
  region net VCC33: 5242.01,6675.4 5250.79,6686.89 5223.23,6686.89 5232.01,6675.4
  region net SD_CM: 5155.4,6674.89 5164.18,6686.89 5136.62,6686.89 5145.4,6674.89
  region net SD_D3: 5078.31,6687.05 5093.31,6686.89 5093.31,6709.55 5078.31,6697.05
  region net SD_D2: 5472.2,6690.58 5467.33,6713.13 5444.07,6686.89 5465.13,6683.51
  region net RSV5: 6760.76,4200.45 6721.97,4210.81 6714.9,4203.74 6725.26,4164.95
  region net RFSH: 6860.76,4300.45 6821.97,4310.81 6814.9,4303.74 6825.26,4264.95
  region net RSV16: 6725.26,4669.14 6714.9,4630.36 6721.97,4623.29 6760.76,4633.65
  region net RESET: 6725.26,4969.14 6714.9,4930.36 6721.97,4923.29 6760.76,4933.65
  region net VCC5: 6883.76,6289.18 6868.66,6323.94 6848.66,6323.94 6833.56,6289.18
  region net 5V-IN: 6661.57,3768.16 6637.83,3762.11 6660.63,3735.4 6668.21,3760.67
  region net 5V-IN: 6314.73,3813.39 6267.4,3860.71 6186.02,3820.59 6292.32,3820.59
  region net VR_SC: 5563.9,3742.78 5574.67,3784.06 5567.6,3791.13 5526.32,3780.36
  region net VG_SY: 5464.97,3768.43 5443.39,3805.23 5433.39,3805.23 5411.82,3768.43
  region net VB_CV: 5350.45,3780.36 5309.17,3791.13 5302.1,3784.06 5312.87,3742.78
  region net HSYNC: 5321.94,3565.34 5345.66,3528.83 5351.66,3528.9 5375.09,3565.99
  region net VSYNC: 5231.5,3565.66 5255.07,3528.86 5261.07,3528.86 5284.65,3565.66
  region net SDAT: 5141.84,3565.1 5165.66,3528.8 5171.66,3528.93 5194.98,3566.23
  region net VR_SC: 5674.43,3864.89 5681.12,3857.43 5709.4,3868.04 5685.03,3893.17
  region net $4N12766: 5703.66,4231.06 5691.16,4216.06 5726.16,4216.06 5713.66,4231.06
  region net VG_SY: 5441.93,3865.74 5432.28,3893.06 5407.8,3868.04 5434.86,3858.66
  region net $4N23356: 5403.66,4231.06 5391.16,4216.06 5426.16,4216.06 5413.66,4231.06
  region net VB_CV: 5142.2,3860.58 5132.28,3888.18 5102.92,3868.04 5131.21,3857.43
  region net VB_CV: 5074.43,3864.89 5081.12,3857.43 5109.4,3868.04 5085.03,3893.17
  region net $4N12254: 5103.66,4231.06 5091.16,4216.06 5126.16,4216.06 5113.66,4231.06
  region net $4N8313: 3798.13,6562.05 3813.13,6550.04 3813.13,6584.06 3798.13,6572.05
  region net USBN1: 3919.2,6557.39 3919.2,6567.39 3904.2,6579.89 3904.2,6550.04
  region net USBN1: 4076.65,6557.39 4091.65,6546.51 4091.65,6578.26 4076.65,6567.39
  region net USBN1: 4136.28,6546.84 4125.67,6578.26 4104.79,6546.51 4133.07,6535.91
  region net $4N8314: 3798.13,6487.05 3813.13,6475.04 3813.13,6509.06 3798.13,6497.05
  region net USBP1: 3919.2,6491.71 3919.2,6501.71 3904.2,6509.06 3904.2,6479.21
  region net SD_D2: 5551.09,6536.89 5561.09,6536.89 5569.87,6551.89 5542.31,6551.89
  region net SD_D2: 5561.09,6645.63 5551.09,6645.63 5542.31,6630.63 5569.87,6630.63
  region net SD_D3: 4774.67,6641.24 4746.38,6630.63 4771.45,6606.2 4782.05,6634.48
  region net SD_D1: 5499.91,6536.89 5509.91,6536.89 5522.41,6551.89 5487.41,6551.89
  region net SD_D1: 5509.91,6640.8 5499.91,6640.8 5487.41,6630.63 5522.41,6630.63
  region net SD_D0: 5409.46,6632.72 5418.31,6606.2 5443.37,6630.63 5416.53,6639.8
  region net SD_CK: 5264.59,6641.24 5236.31,6630.63 5263.58,6608.4 5274.18,6636.68
  region net SD_CK: 5238.66,6536.89 5248.66,6536.89 5261.16,6551.89 5226.16,6551.89
  region net VCC33: 5150.47,6536.89 5162.97,6551.89 5127.97,6551.89 5140.47,6536.89
  region net VCC33: 5161.94,6634.8 5140.09,6630.63 5165.16,6606.2 5169.01,6627.72
  region net SD_CM: 4880.48,6634.48 4873.1,6641.24 4844.81,6630.63 4869.88,6606.2
  region net SD_CM: 4843.66,6536.89 4853.66,6536.89 4866.16,6551.89 4831.16,6551.89
  region net 5V-IN: 6277.1,6565.08 6287.07,6601.37 6279.99,6608.44 6243.7,6598.48
  region net VCC5: 3666.29,5563.57 3696.47,5543.13 3724.31,5570.97 3703.87,5601.16
  region net IO7: 3911.21,6061.73 3874.41,6040.16 3874.41,6030.16 3911.21,6008.58
  region net IO9: 3911.93,5953.29 3874.55,5932.05 3874.28,5922.05 3910.5,5900.16
  region net VCC5: 3899.28,5601.16 3878.83,5570.97 3906.67,5543.13 3936.86,5563.57
  region net VCC5: 3970.01,5596.72 3991.16,5627.61 3963.32,5655.45 3932.43,5634.3
  region net IO8: 3825.05,6015.99 3783.78,6026.76 3776.71,6019.69 3787.47,5978.41
  region net IO10: 3821.51,5906.99 3780.96,5915.52 3774.6,5907.74 3787.87,5865.84
  region net $4N8663: 6877.95,3758.58 6978.34,3758.03 6978.34,3826.06 6877.95,3825.51
  region net VCC33: 6483.23,4582.8 6488.97,4601.49 6457.48,4601.49 6463.23,4582.8
  region net RESET: 6574.84,4619.29 6559.84,4627.08 6559.84,4601.49 6574.84,4609.29
  region net RESET: 6515.9,4609.29 6528.35,4601.49 6528.35,4627.08 6515.9,4619.29
  region net VCC33: 6483.23,4614.29 6463.23,4614.29 6457.48,4592.64 6488.97,4592.64
  region net VCC33: 6483.23,4551.3 6488.97,4572.96 6457.48,4572.96 6463.23,4551.3
  region net RSV16: 6574.84,4587.8 6559.84,4592.64 6559.84,4572.96 6574.84,4577.8
  region net VCC33: 6483.23,4519.81 6488.97,4541.46 6457.48,4541.46 6463.23,4519.81
  region net VCC33: 6483.23,4582.8 6463.23,4582.8 6457.48,4561.14 6488.97,4561.14
  region net RFSH: 6574.84,4556.3 6559.84,4561.14 6559.84,4541.46 6574.84,4546.3
  region net VCC33: 6483.23,4477.01 6488.97,4507.01 6457.48,4507.01 6463.23,4477.01
  region net VCC33: 6483.23,4551.3 6463.23,4551.3 6457.48,4532.6 6488.97,4532.6
  region net RSV5: 6574.84,4524.81 6559.84,4532.6 6559.84,4507.01 6574.84,4514.81
  region net $4N10775: 4452.2,3782.76 4445.13,3789.83 4423.36,3785.75 4449.61,3762.49
  region net $4N10776: 4329.46,3638.87 4320.89,3633.3 4331.5,3605.01 4357.74,3628.27
  region net VB_CV: 4464.61,3477.05 4464.61,3487.05 4449.61,3499.55 4449.61,3464.55
  region net $4N10779: 5073.66,5455.47 5083.66,5455.47 5095.79,5470.47 5061.16,5470.47
  region net $4N10777: 4973.66,5455.47 4983.66,5455.47 4996.16,5470.47 4961.54,5470.47
  region net $4N10776: 5643.66,5326.51 5655.67,5341.51 5621.65,5341.51 5633.66,5326.51
  region net $4N10778: 5633.66,5447.58 5621.65,5432.58 5655.67,5432.58 5643.66,5447.58
  region net LED8: 3985.28,4284.72 3981.03,4288.96 3964.06,4282.6 3978.91,4267.75
  region net $4N317: 3708.16,3947.6 3697.41,3932.6 3728.91,3932.6 3718.16,3947.6
  region net $4N10781: 5514.25,5390.23 5542.53,5400.83 5521.65,5432.58 5511.05,5401.16
  region net $4N10781: 5533.66,5447.58 5521.65,5432.58 5555.67,5432.58 5543.66,5447.58
  region net $4N10782: 5543.66,5326.51 5555.67,5341.51 5521.65,5341.51 5533.66,5326.51
  region net VCC5: 5326.22,5544.76 5320.47,5514.76 5351.97,5514.76 5346.22,5544.76
  region net VCC5: 5346.11,5449.33 5351.97,5479.33 5320.47,5479.33 5326.11,5449.33
  region net $4N10776: 5643.66,5307.58 5633.66,5307.58 5621.65,5292.58 5655.67,5292.58
  region net VCC33: 5196.65,6427.39 5226.65,6421.51 5226.65,6453.26 5196.65,6447.39
  region net VCC33: 5290.67,6447.39 5260.67,6453.26 5260.67,6421.51 5290.67,6427.39
  region net SD_CK: 5238.66,6527.58 5226.65,6512.58 5260.67,6512.58 5248.66,6527.58
  region net VCC33: 4895.67,6427.39 4895.67,6447.39 4865.67,6453.26 4865.67,6421.51
  region net VCC33: 4801.65,6427.39 4831.65,6421.51 4831.65,6453.26 4801.65,6447.39
  region net SD_CM: 4843.66,6527.58 4831.65,6512.58 4865.67,6512.58 4853.66,6527.58
  region net $4N10787: 5543.66,5186.51 5555.67,5201.51 5521.65,5201.51 5533.66,5186.51
  region net $4N10782: 5543.66,5307.58 5533.66,5307.58 5521.65,5292.58 5555.67,5292.58
  region net $4N10779: 5149.95,5387.05 5174.96,5380.86 5174.96,5403.24 5149.95,5397.05
  region net $4N10780: 5149.95,5337.05 5174.96,5330.86 5174.96,5353.24 5149.95,5347.05
  region net $4N10768: 5254.32,5286.94 5254.42,5296.94 5229.36,5303.24 5229.36,5280.86
  region net VCC5: 5363.77,5401.94 5363.77,5381.94 5387.96,5380.86 5387.96,5403.24
  region net $4N10781: 5459,5337.05 5459,5347.05 5442.36,5353.24 5442.36,5330.86
  region net $4N10782: 5467.37,5297.05 5442.36,5303.24 5442.36,5280.86 5467.37,5287.05
  region net LED1: 3981.03,4988.96 3964.06,4982.6 3978.91,4967.75 3985.28,4984.72
  region net LED6: 3985.28,4484.72 3981.03,4488.96 3964.06,4482.6 3978.91,4467.75
  region net $4N10768: 5331.11,5169.76 5320.47,5154.76 5351.97,5154.76 5341.11,5169.76
  region net $4N10775: 4983.66,5326.51 4995.67,5341.51 4961.65,5341.51 4973.66,5326.51
  region net $4N10777: 4973.66,5447.58 4961.65,5432.58 4995.67,5432.58 4983.66,5447.58
  region net $4N10779: 5073.66,5447.58 5061.65,5432.58 5095.67,5432.58 5083.66,5447.58
  region net $4N10779: 5098.07,5390.23 5106.28,5396.16 5095.67,5424.45 5069.79,5400.83
  region net $4N10780: 5083.66,5340.68 5095.67,5341.51 5061.65,5341.51 5073.66,5340.68
  region net $4N10775: 4983.66,5307.58 4973.66,5307.58 4961.65,5292.58 4995.67,5292.58
  region net $4N10767: 5083.66,5178.62 5073.66,5178.62 5061.16,5163.62 5095.79,5163.62
  region net $4N10780: 5083.66,5307.58 5073.66,5307.58 5061.65,5292.58 5095.67,5292.58
  region net $4N10767: 5083.66,5186.51 5095.67,5201.51 5061.65,5201.51 5073.66,5186.51
  region net SD_CK: 5244.29,6337.03 5237.2,6340.58 5230.13,6333.51 5233.68,6326.42
  region net SD_D0: 5439.29,6357.03 5432.2,6360.58 5425.13,6353.51 5428.68,6346.42
  region net SD_CK: 5236.16,6525.43 5238.66,6515.05 5248.66,6515.05 5251.16,6525.43
  region net SD_CK: 5251.16,6538.66 5248.66,6549.05 5238.66,6549.05 5236.16,6538.66
  region net SDAT: 5176.16,3488.66 5171.66,3499.05 5165.66,3499.05 5161.16,3488.66
  region net VSYNC: 5265.76,3499.09 5261.07,3509.22 5255.07,3508.87 5250.78,3498.21
  region net HSYNC: 5356.16,3513.66 5351.66,3524.05 5345.66,3524.05 5341.16,3513.66
  region net $4N23356: 5065.28,4684.55 5075.66,4687.05 5075.66,4697.05 5065.28,4699.55
  region net $4N12766: 5440.28,4684.55 5450.66,4687.05 5450.66,4697.05 5440.28,4699.55
  region net RESET: 4481.16,4138.66 4478.66,4149.05 4468.66,4149.05 4466.16,4138.66
  region net IO10: 3688.03,6084.83 3697.15,6079.25 3704.22,6086.32 3698.64,6095.43
  region net IO9: 3688.03,6116.32 3697.15,6110.74 3704.22,6117.81 3698.64,6126.92
  region net IO8: 3688.03,6147.82 3697.15,6142.24 3704.22,6149.31 3698.64,6158.42
  region net IO7: 3688.03,6179.31 3697.15,6173.73 3704.22,6180.8 3698.64,6189.91
  region net $4N10687: 5901.16,4830.43 5903.66,4820.05 5913.66,4820.05 5916.16,4830.43
  region net SD_CM: 4841.16,6525.43 4843.66,6515.05 4853.66,6515.05 4856.16,6525.43
  region net SD_CM: 4856.16,6538.66 4853.66,6549.05 4843.66,6549.05 4841.16,6538.66
  region net $4N10776: 5631.16,5310.43 5633.66,5300.05 5643.66,5300.05 5646.16,5310.43
  region net $4N10776: 5646.16,5323.66 5643.66,5334.05 5633.66,5334.05 5631.16,5323.66
  region net $4N10775: 4971.16,5310.43 4973.66,5300.05 4983.66,5300.05 4986.16,5310.43
  region net $4N10775: 4986.16,5323.66 4983.66,5334.05 4973.66,5334.05 4971.16,5323.66
  region net SD_D3: 4754.29,6297.03 4747.2,6300.58 4740.13,6293.51 4743.68,6286.42
  region net SD_CM: 4849.29,6317.03 4842.2,6320.58 4835.13,6313.51 4838.68,6306.42
  region net LED8: 4083.25,5405.43 4079.08,5394.91 4083.33,5390.67 4093.85,5394.83
  region net LED1: 4083.25,5699.91 4079.08,5689.39 4083.33,5685.15 4093.85,5689.31
  region net LED2: 4083.25,5668.42 4079.08,5657.9 4083.33,5653.66 4093.85,5657.82
  region net LED3: 4083.25,5636.92 4079.08,5626.4 4083.33,5622.16 4093.85,5626.32
  region net LED4: 4083.25,5605.43 4079.08,5594.91 4083.33,5590.67 4093.85,5594.83
  region net LED5: 4083.25,5499.91 4079.08,5489.39 4083.33,5485.15 4093.85,5489.31
  region net LED6: 4083.25,5468.42 4079.08,5457.9 4083.33,5453.66 4093.85,5457.82
  region net LED7: 4083.25,5436.92 4079.08,5426.4 4083.33,5422.16 4093.85,5426.32
  region net $4N12254: 4800.28,4684.55 4810.66,4687.05 4810.66,4697.05 4800.28,4699.55
  region net KDAT: 4110.28,4629.55 4120.66,4632.05 4120.66,4642.05 4110.28,4644.55
  region net SD_D1: 4110.28,4889.55 4120.66,4892.05 4120.66,4902.05 4110.28,4904.55
  region net SD_D0: 4110.28,4859.55 4120.66,4862.05 4120.66,4872.05 4110.28,4874.55
  region net SD_CK: 4110.28,4829.55 4120.66,4832.05 4120.66,4842.05 4110.28,4844.55
  region net SD_CM: 4110.28,4799.55 4120.66,4802.05 4120.66,4812.05 4110.28,4814.55
  region net SD_D2: 4110.28,4659.55 4120.66,4662.05 4120.66,4672.05 4110.28,4674.55
  region net SD_D3: 4110.28,4689.55 4120.66,4692.05 4120.66,4702.05 4110.28,4704.55
  region net RESET: 4466.16,4300.43 4468.66,4290.05 4478.66,4290.05 4481.16,4300.43
  region net $4N10776: 4416.16,4300.43 4418.66,4290.05 4428.66,4290.05 4431.16,4300.43
  region net $4N10775: 4441.16,4320.43 4443.66,4310.05 4453.66,4310.05 4456.16,4320.43
  region net PWRLED: 4391.16,4320.43 4393.66,4310.05 4403.66,4310.05 4406.16,4320.43
  region net KCLK: 4110.28,4599.55 4120.66,4602.05 4120.66,4612.05 4110.28,4614.55
  region net KCLK: 5761.16,6930.43 5763.66,6920.05 5773.66,6920.05 5776.16,6930.43
  region net KCLK: 5770.64,6977.25 5782.52,6977.05 5788.29,6987.05 5778.14,6990.24
  region net KCLK: 5759.18,6990.24 5749.03,6987.05 5754.8,6977.05 5766.68,6977.25
  region net SOUND_R: 6246.16,6783.66 6243.66,6794.05 6233.66,6794.05 6231.16,6783.66
  region net $4N10687: 5803.64,4691.42 5809.22,4700.53 5802.15,4707.6 5793.03,4702.03
  region net RESET: 6150.53,4297.07 6159.65,4291.49 6166.72,4298.56 6161.14,4307.67
Bottom Layer:
  drawing of 624 lines, arcs and shapes, not listed

## Silkscreen, mask and mechanical layers (free items; w line width, h text height)
Top Silkscreen Layer:
  lines w10 net "": 4145.67,4317.05 ccw(c4195.67,4317.05) 4195.67,4267.05 6395.67,4267.05 ccw(c6395.67,4317.05) 6445.67,4317.05 6445.67,7267.05 ccw(c6395.67,7267.05) 6395.67,7317.05 4195.67,7317.05 ccw(c4195.67,7267.05) 4145.67,7267.05 4145.67,4317.05
  text "JLCJLCJLCJLC" at 6753.84,7264.04 h20.44
  text "Thanks to the original author of umsx" at 6101.77,6762.77 h38.33 r270
  text "2018 BCH @VDR" at 5996.77,6722.38 h38.33 r270
  text "www.va-de-retro.com" at 5996.77,6177.25 h38.33 r270
  text "uMSX Rev. 4.5 - IO Board v0.1" at 6609.24,6042.26 h51.1 r270
  text "Denjhang 2023.7.8" at 6511.14,6012.83 h51.1 r270

## Text inside footprints (layer, text, board x,y; h text height)
S1: Top Silkscreen Layer "C" at 3753.66,3802.42 h75.94 r180; Top Silkscreen Layer "Y" at 4183.66,3802.42 h75.94 r180
X1: Top Silkscreen Layer "1" at 6807.31,7040.67 h45.96; Top Silkscreen Layer "2" at 6912.31,7040.67 h45.96; Top Silkscreen Layer "3" at 6727.31,7040.67 h45.96; Top Silkscreen Layer "5" at 6997.31,7040.67 h45.96; Top Silkscreen Layer "6" at 6772.31,6895.67 h45.96; Top Silkscreen Layer "8" at 6947.31,6895.67 h45.96